# Altium PCB PAY-IF_R100.PcbDoc (part 3 of 5)
Units mm, origin at the board's own origin, x right, y up, seen from the top; angles counter-clockwise.
Board outline 93 x 90 mm, 6 copper layers (Top Layer, L2_GND, L3_PWR, L4_SIG, L5_GND, Bottom Layer), stack 1.598 mm thick; 271 components, 237 nets, 1362 pads, 661 vias.
Unrouted connection lines stored in the file: 5.
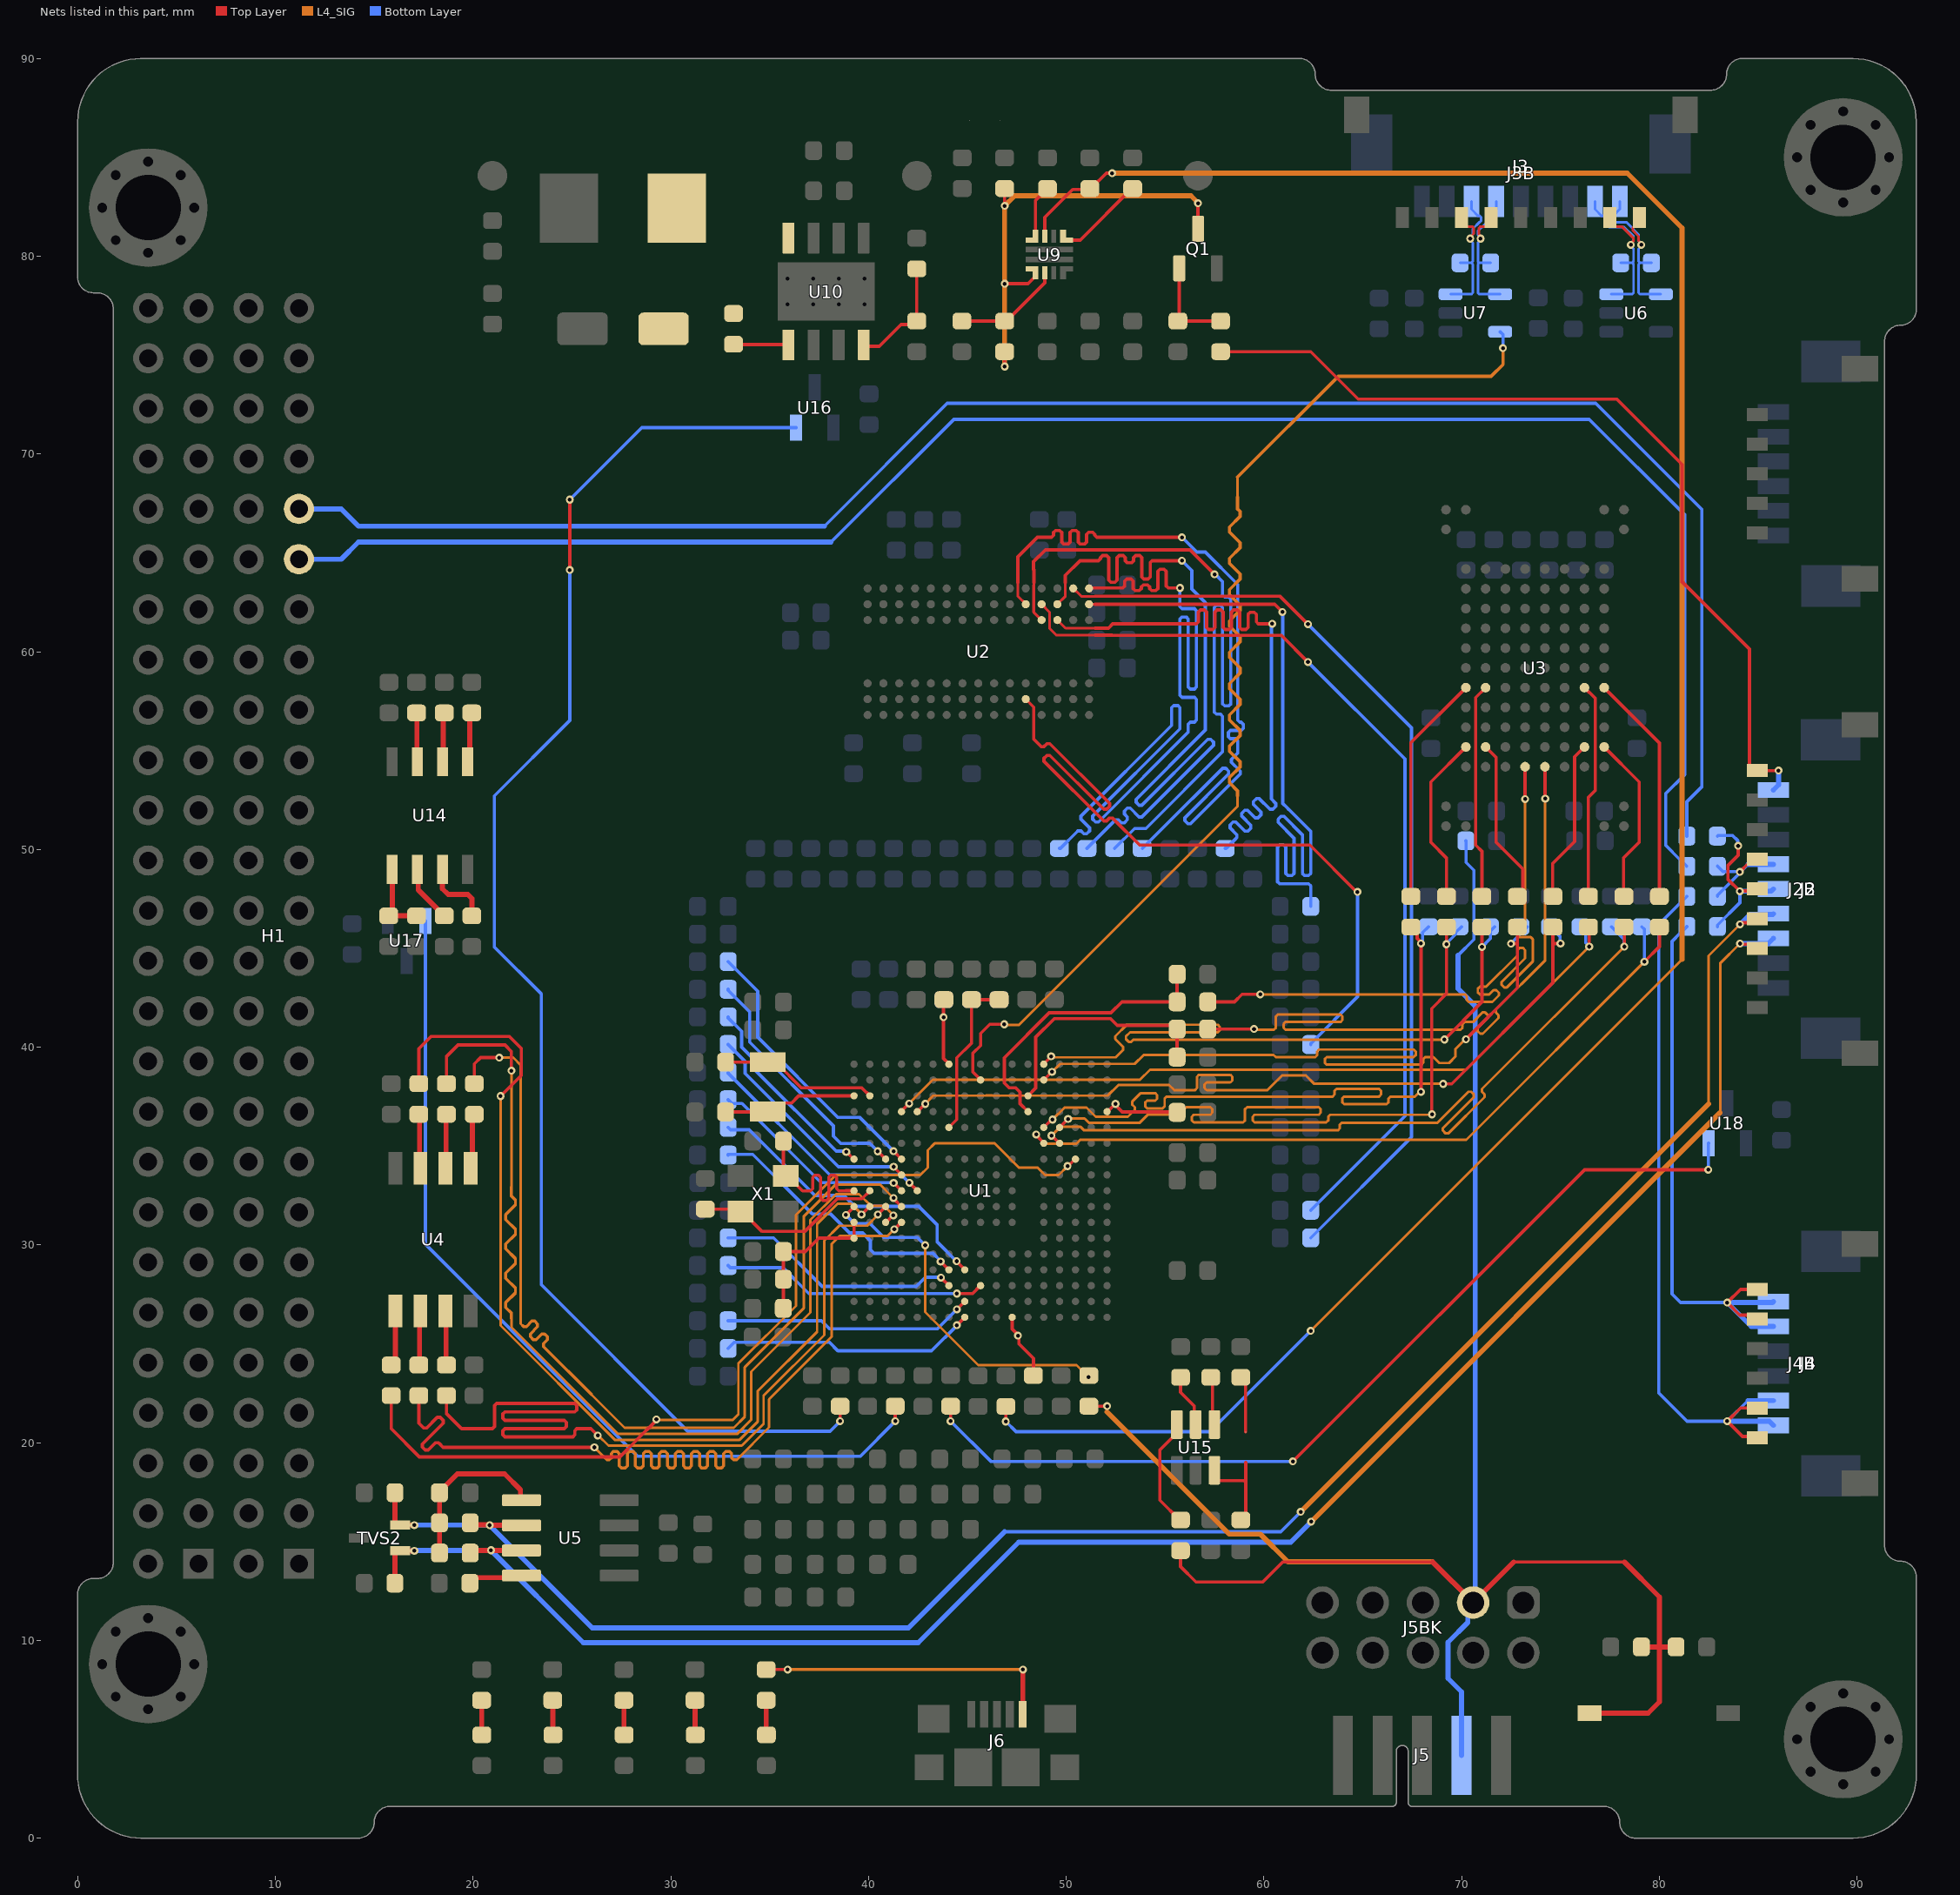
[diagram p7: the nets of this part, all layers, seen from the top]

## Via types
v1: diameter 0.4, hole 0.2, Top Layer to Bottom Layer, tented both sides, 661 vias

## Nets (pads, with @x,y where several pads share a name; then routed paths per layer and width w, separated by ;. In a path a pad name is that pad's centre, name@x,y a point inside that pad or via, vN(x,y) a via of type N, cw(c..) or ccw(c..) an arc to the next point about the centre after c; other vN are vias at no path point) (continued)
LVDS_SPI_SCK: U1.B9 U7.5 | length 58.6
  Top Layer w0.165: U1.B9@45.669,38.339 45.669,38.366 45.282,38.753 45.282,38.971 45.277,38.976 45.277,39.302 45.282,39.307 45.282,39.691 45.671,40.081 45.671,40.693 46.134,41.156 v1(46.866,41.156)
  L4_SIG w0.13: v1(46.866,41.156) 46.889,41.133 47.622,41.133 58.674,52.185 58.674,52.705 ; 58.674,67.818 58.674,68.834
  L4_SIG w0.169: 58.674,52.705 58.674,52.967 58.259,53.382 58.259,53.636 58.797,54.174 58.797,54.428 58.259,54.965 58.259,55.219 58.797,55.757 58.797,56.011 58.259,56.549 58.259,56.803 58.797,57.34 58.797,57.594 58.259,58.132 58.259,58.386 58.797,58.924 58.797,59.178 58.259,59.715 58.259,59.969 58.797,60.507 58.797,60.761 58.259,61.298 58.259,61.552 58.797,62.09 58.797,62.344 58.259,62.882 58.259,63.136 58.797,63.673 58.797,63.927 58.259,64.465 58.259,64.719 58.797,65.257 58.797,65.511 58.259,66.048 58.259,66.302 58.797,66.84 58.797,67.094 58.674,67.217 58.674,67.818 ; 58.674,68.834 63.775,73.935 71.501,73.935 72.096,74.53 v1(72.096,75.349)
  Bottom Layer w0.169: U7.5@71.954,76.177 72.096,76.035 v1(72.096,75.349)
LVDS_TxC_N: J3.7 J3B.3 R93.1 U7.3 | length 8.5
  Top Layer w0.13: J3.7@70,81.958 70,81.767 70.265,81.502 70.545,81.502 70.621,81.426 70.621,81.318 70.619,81.316 70.619,81.145 70.436,80.963 v1(70.436,80.89)
  Bottom Layer w0.13: U7.3@69.444,78.077 70.494,78.077 70.57,78.153 70.57,79.591 70.494,79.667 ; R93.1@69.924,79.667 70.494,79.667 ; J3B.3@70.5,82.773 70.5,82.373 70.835,82.038 70.92,82.038 70.996,81.962 70.996,81.8 70.92,81.724 70.908,81.724 70.57,81.387 70.57,81.097 70.436,80.963 v1(70.436,80.89) 70.436,80.817 70.57,80.683 70.57,80.301 70.57,79.743 70.494,79.667
LVDS_TxC_P: J3.6 J3B.4 R93.2 U7.4 | length 8.5
  Top Layer w0.13: v1(70.961,80.89) 70.91,80.942 70.91,81.068 70.876,81.101 70.876,81.209 70.879,81.212 70.879,81.426 70.955,81.502 71.235,81.502 71.5,81.767 J3.6@71.5,81.958
  Bottom Layer w0.13: R93.2@71.474,79.667 70.904,79.667 ; J3B.4@71.75,82.773 71.75,82.373 71.415,82.038 71.33,82.038 71.254,81.962 71.254,81.694 71.027,81.467 71.014,81.467 70.828,81.28 70.828,81.097 70.961,80.963 v1(70.961,80.89) 70.961,80.817 70.828,80.683 70.828,80.407 70.828,79.743 70.904,79.667 ; U7.4@71.954,78.077 70.904,78.077 70.828,78.153 70.828,79.591 70.904,79.667
LVDS_TxD_N: J3.2 J3B.8 R92.1 U6.3 | length 10
  Top Layer w0.13: J3.2@77.5,81.958 77.5,81.767 77.765,81.502 78.104,81.502 78.698,80.908 78.698,80.785 78.564,80.651 v1(78.564,80.578)
  Bottom Layer w0.13: J3B.8@76.75,82.773 76.75,82.373 77.085,82.038 77.17,82.038 77.246,81.962 77.246,81.694 77.473,81.467 78.228,81.467 78.698,80.996 78.698,80.785 78.564,80.651 v1(78.564,80.578) 78.564,80.505 78.698,80.371 78.698,80.145 78.698,79.743 78.622,79.667 ; U6.3@77.572,78.077 78.622,78.077 78.698,78.153 78.698,79.591 78.622,79.667 ; R92.1@78.052,79.667 78.622,79.667
LVDS_TxD_P: J3.1 J3B.9 R92.2 U6.4 | length 9.5
  Top Layer w0.13: J3.1@79,81.958 79,81.767 78.655,81.423 78.655,81.315 78.956,81.015 78.956,80.785 79.089,80.651 v1(79.089,80.578)
  Bottom Layer w0.13: J3B.9@78,82.773 78,82.373 77.665,82.038 77.58,82.038 77.504,81.962 77.504,81.8 77.58,81.724 78.334,81.724 78.956,81.103 78.956,80.785 79.089,80.651 v1(79.089,80.578) 79.089,80.505 78.956,80.371 78.956,80.251 78.956,79.743 79.032,79.667 ; R92.2@79.602,79.667 79.032,79.667 ; U6.4@80.082,78.077 79.032,78.077 78.956,78.153 78.956,79.591 79.032,79.667
MCU_VCAP: C46.2 C86.2 C87.2 U1.A7 U1.D17 U1.U11 | length 10.6
  Top Layer w0.165: v1(43.795,41.512) 43.795,39.435 44.069,39.161 U1.A7@44.069,39.139 ; v1@43.799,41.516 C87.2@43.799,42.389 ; U1.U11@47.269,26.339 47.269,25.749 47.562,25.456 v1(47.562,25.41) ; v1@47.568,25.346 47.607,25.307 47.607,24.994 48.343,24.258 C46.2@48.343,23.393 ; U1.D17@52.069,36.739 52.088,36.739 52.478,37.129 v1(52.497,37.129) 52.497,37.066 52.723,36.84 52.723,36.838 52.84,36.721 55.595,36.721 C86.2@55.613,36.703
MRAM_CLK: R98.2 U1.L3 | length 52.3
  Top Layer w0.165: U1.L3@40.869,31.139 40.887,31.139 41.244,31.496 v1(41.262,31.496)
  Top Layer w0.169: R98.2@18.654,38.153 18.654,39.521 19.247,40.114 21.61,40.114 21.937,39.786 21.937,38.815 v1(21.945,38.807)
  L4_SIG w0.13: 21.945,26.289 21.945,25.83 27.339,20.437 33.356,20.437 34.074,21.154 34.074,23.587 37.067,26.581 37.067,31.268 38.367,32.568 39.528,32.568 40.127,31.969 40.789,31.969 v1(41.262,31.496) ; 21.945,32.933 v1(21.945,38.807)
  L4_SIG w0.152: 21.945,26.289 21.945,26.543 21.657,26.831 21.657,27.085 22.144,27.572 22.144,27.826 21.657,28.314 21.657,28.568 22.144,29.055 22.144,29.309 21.657,29.796 21.657,30.05 22.144,30.537 22.144,30.791 21.657,31.278 21.657,31.532 22.144,32.019 22.144,32.273 21.945,32.472 21.945,32.933
MRAM_CS: R94.1 U1.G15 | length 49.2
  Top Layer w0.165: 27.429,19.279 28.273,20.123 28.273,20.131 29.273,21.13 v1(29.273,21.177) ; v1(50.071,33.985) 50.093,33.985 50.447,34.339 U1.G15@50.469,34.339
  Top Layer w0.169: R94.1@15.86,22.379 15.86,20.704 17.285,19.279 27.429,19.279
  L4_SIG w0.13: v1(29.273,21.177) 29.296,21.154 33.142,21.154 33.419,21.431 33.419,24.002 36.33,26.913 36.33,31.518 38.355,33.543 42.632,33.543 43,33.911 43,34.785 43.345,35.129 46.385,35.129 47.61,33.904 48.56,33.904 48.926,33.538 49.125,33.538 49.126,33.539 49.449,33.539 49.45,33.538 49.624,33.538 v1(50.071,33.985)
MRAM_IO0: R99.2 U1.K4 | length 49.8
  Top Layer w0.165: v1(41.269,32.37) 41.269,32.339 U1.K4@41.669,31.939
  Top Layer w0.169: R99.2@20.064,38.153 20.064,39.153 20.379,39.468 v1(21.326,39.468)
  L4_SIG w0.13: v1(21.326,39.468) 22.031,39.468 22.41,39.089 22.41,26.009 22.499,25.919 ; 25.993,22.425 27.666,20.752 33.186,20.752 33.749,21.314 33.749,23.815 36.725,26.791 36.725,31.434 38.347,33.056 40.583,33.056 v1(41.269,32.37)
  L4_SIG w0.152: 22.499,25.919 22.553,25.866 22.696,25.866 22.976,26.145 23.119,26.145 23.263,26.001 23.263,25.858 22.901,25.496 22.901,25.353 23.045,25.209 23.188,25.209 23.475,25.495 23.618,25.495 23.762,25.352 23.762,25.208 23.558,25.004 23.558,24.861 25.993,22.425
MRAM_IO1: R95.1 U1.L4 | length 48.7
  Top Layer w0.165: v1(41.307,30.789) 41.314,30.789 41.663,31.139 U1.L4@41.669,31.139
  Top Layer w0.169: R95.1@17.257,22.379 17.257,21.104 17.257,20.985 17.502,20.74 17.651,20.74 18.192,21.281 18.341,21.281 18.491,21.131 18.491,20.981 17.433,19.923 17.433,19.774 17.582,19.624 17.732,19.624 18.1,19.992 18.249,19.992 18.309,19.932 18.48,19.761 v1(26.137,19.761)
  L4_SIG w0.13: v1(26.137,19.761) 26.771,19.127 26.812,19.127 ; 33.334,19.127 34.976,20.77 34.976,22.188 38.133,25.345 38.133,30.036 38.549,30.452 40.97,30.452 v1(41.307,30.789)
  L4_SIG w0.152: 26.812,19.127 26.888,19.127 26.989,19.228 26.989,19.45 27.091,19.552 27.294,19.552 27.395,19.45 27.395,18.826 27.497,18.725 27.7,18.725 27.801,18.826 27.801,19.45 27.903,19.552 28.106,19.552 28.207,19.45 28.207,18.826 28.309,18.725 28.512,18.725 28.613,18.826 28.613,19.45 28.715,19.552 28.918,19.552 29.019,19.45 29.019,18.826 29.121,18.725 29.324,18.725 29.425,18.826 29.425,19.45 29.527,19.552 29.73,19.552 29.831,19.45 29.831,18.826 29.933,18.725 30.136,18.725 30.237,18.826 30.237,19.45 30.339,19.552 30.542,19.552 30.643,19.45 30.643,18.826 30.745,18.725 30.948,18.725 31.049,18.826 31.049,19.45 31.151,19.552 31.354,19.552 31.455,19.45 31.455,18.826 31.557,18.725 31.76,18.725 31.861,18.826 31.861,19.45 31.963,19.552 32.166,19.552 32.267,19.45 32.267,18.826 32.369,18.725 32.572,18.725 32.673,18.826 32.673,19.45 32.775,19.552 32.978,19.552 33.079,19.45 33.079,19.228 33.181,19.127 33.334,19.127
MRAM_IO2: R97.1 U1.K3 | length 49
  Top Layer w0.165: 25.339,20.708 25.959,20.708 v1(26.31,20.357) ; v1(40.473,31.533) 40.473,31.538 40.869,31.934 U1.K3@40.869,31.939
  Top Layer w0.169: R97.1@18.654,22.379 18.654,21.478 19.424,20.708 20.891,20.708 20.975,20.708 21.081,20.814 21.081,21.237 21.081,21.871 21.187,21.977 25.148,21.977 25.254,21.871 25.254,21.66 25.148,21.554 21.61,21.554 21.504,21.448 21.504,21.237 21.61,21.131 24.62,21.131 24.725,21.025 24.725,20.814 24.62,20.708 21.61,20.708 21.504,20.602 21.504,20.391 21.61,20.285 25.043,20.285 25.148,20.391 25.148,20.602 25.254,20.708 25.339,20.708
  L4_SIG w0.13: v1(26.31,20.357) 26.336,20.357 26.848,19.844 33.592,19.844 34.696,20.949 34.696,22.375 37.76,25.438 37.76,30.207 38.524,30.971 39.929,30.971 40.473,31.515 v1(40.473,31.533)
MRAM_IO3: R96.2 U1.K2 | length 52.4
  Top Layer w0.165: v1(39.646,31.539) 39.657,31.539 40.057,31.939 U1.K2@40.069,31.939
  Top Layer w0.169: R96.2@17.257,38.153 17.257,39.926 17.869,40.538 21.843,40.538 22.443,39.938 22.443,38.577 v1(21.391,37.525)
  L4_SIG w0.13: v1(21.391,37.525) 21.391,25.919 27.167,20.143 33.484,20.143 34.393,21.052 34.393,22.593 37.403,25.604 37.403,31.057 38.432,32.086 39.122,32.086 39.646,31.562 v1(39.646,31.539)
NetC35_1: C35.1 R114.1 R115.2 U5.5 | length 8.5
  Top Layer w0.254: R114.1@18.305,14.417 R115.2@18.305,15.941 C35.1@18.305,17.465 18.305,17.515 19.205,18.415 21.6,18.415 22.399,17.616 22.399,17.137 U5.5@22.452,17.084
NetC42_2: C42.2 U9.10 | length 2.7
  Top Layer w0.165: U9.10@48.447,81.013 48.447,82.819 48.706,83.078 48.706,83.082 49.051,83.426 C42.2@49.054,83.426
NetC43_2: C43.2 U9.7 | length 4.8
  Top Layer w0.165: U9.7@49.847,81.013 49.847,80.842 49.87,80.819 50.709,80.819 53.316,83.426 C43.2@53.366,83.426
NetC44_1: C44.1 D1.2 L1.1 U10.8
NetC44_2: C44.2 U10.1 | length 2.8
  Top Layer w0.165: C44.2@33.173,75.552 33.191,75.534 35.935,75.534 U10.1@35.952,75.517
NetC93_2: C93.2 C94.2 FB2.2 U1.L1 U1.M1 | length 7.5
  Top Layer w0.165: FB2.2@35.692,26.794 35.696,26.798 35.696,29.658 C93.2@35.7,29.662 36.811,29.662 37.488,30.339 U1.M1@39.269,30.339 U1.L1@39.269,31.139
NetJ2_3: J2.3 J2B.7 R114.2 R143.1 TVS2.1 U5.7 | length 96.1
  Top Layer w0.165: v1(84.083,45.238) 84.109,45.238 84.143,45.203 84.755,45.203 J2.3@84.958,45
  Top Layer w0.254: R143.1@16.047,12.893 16.047,14.427 16.149,14.529 TVS2.1@16.311,14.529 v1(17.03,14.529) ; R114.2@19.855,14.417 19.978,14.54 20.887,14.54 v1(20.906,14.559) 20.913,14.551 22.444,14.551 U5.7@22.452,14.544
  L4_SIG w0.13: 83.081,36.692 83.081,44.236 v1(84.083,45.238)
  L4_SIG w0.254: v1(62.393,16.003) 83.081,36.692
  Bottom Layer w0.254: v1(17.03,14.529) 17.045,14.544 20.891,14.544 v1(20.906,14.559) 25.578,9.886 42.516,9.886 47.597,14.968 61.358,14.968 v1(62.393,16.003) ; v1(84.083,45.238) 85.507,45.238 J2B.7@85.77,45.5
NetJ2_4: J2.4 J2B.6 R115.1 R142.1 TVS2.2 U5.6 | length 96.4
  Top Layer w0.165: v1(84.083,46.208) 84.109,46.208 84.198,46.297 84.755,46.297 J2.4@84.958,46.5
  Top Layer w0.254: R142.1@16.047,17.465 16.047,15.93 16.149,15.829 TVS2.2@16.311,15.829 v1(17.03,15.829) ; R115.1@19.855,15.941 19.955,15.84 20.82,15.84 v1(20.839,15.822) 20.843,15.818 22.448,15.818 U5.6@22.452,15.814
  L4_SIG w0.13: 82.494,37.13 82.494,44.619 v1(84.083,46.208)
  L4_SIG w0.254: v1(61.865,16.5) 82.494,37.13
  Bottom Layer w0.165: v1@20.832,15.829 v1(20.839,15.822) ; 46.889,15.494 60.859,15.494 v1(61.865,16.5)
  Bottom Layer w0.254: v1(17.03,15.829) v1@20.832,15.829 ; v1(20.839,15.822) 26.029,10.631 42.026,10.631 46.889,15.494 ; v1(84.083,46.208) 84.591,46.717 85.736,46.717 J2B.6@85.77,46.75
NetJ2_5: J2.5 J2B.5 R90.1 R150.2 | length 9.1
  Top Layer w0.165: v1(83.989,50.18) 83.989,49.703 83.469,49.182 83.469,48.492 v1(84.075,47.885) 84.094,47.903 84.861,47.903 J2.5@84.958,48
  Bottom Layer w0.165: R90.1@82.944,46.101 82.944,46.169 84.075,47.3 84.075,47.767 v1(84.075,47.885) ; R150.2@82.944,50.673 82.98,50.709 83.709,50.709 83.971,50.447 83.971,50.198 v1(83.989,50.18)
  Bottom Layer w0.254: v1(84.075,47.885) 85.655,47.885 J2B.5@85.77,48
NetJ2_6: J2.6 J2B.4 R89.1 R148.2 | length 6
  Top Layer w0.165: v1(84.076,48.866) 84.507,49.297 84.755,49.297 J2.6@84.958,49.5
  Bottom Layer w0.165: R89.1@82.944,47.625 82.944,47.678 84.058,48.792 84.058,48.848 v1(84.076,48.866) ; R148.2@82.944,49.149 83.208,48.885 84.058,48.885 v1(84.076,48.866) ; 84.483,49.247 84.102,48.866 v1(84.076,48.866)
  Bottom Layer w0.254: 84.483,49.247 J2B.4@85.767,49.247
NetJ2_9: J2.9 J2B.1 R88.1 | length 45
  Top Layer w0.165: R88.1@57.811,75.171 62.37,75.171 64.77,72.771 77.851,72.771 81.153,69.469 81.153,63.542 84.564,60.13 84.564,54.248 84.812,54 J2.9@84.958,54 84.972,53.986 v1(86.034,53.986)
  Bottom Layer w0.254: J2B.1@85.77,53 86.034,53.264 v1(86.034,53.986)
NetJ6_1: J6.1 R100.2 | length 15.3
  Top Layer w0.152: R100.2@34.826,8.521 v1(35.912,8.521)
  Top Layer w0.254: J6.1@47.8,6.257 47.808,6.265 47.808,8.515 v1(47.815,8.523)
  L4_SIG w0.152: v1(35.912,8.521) v1(35.912,8.521) 47.814,8.522 v1(47.815,8.523)
NetLED1_1: LED1.1 R79.2 | length 1.8
  Top Layer w0.254: R79.2@27.63,6.971 27.637,6.965 27.637,5.226 LED1.1@27.643,5.22
NetLED2_1: LED2.1 R80.2 | length 1.8
  Top Layer w0.254: R80.2@31.228,6.971 31.234,6.965 31.234,5.226 LED2.1@31.241,5.22
NetLED3_1: LED3.1 R119.1 | length 1.9
  Top Layer w0.254: 20.435,6.302 20.441,6.296 ; R119.1@20.441,7.093 20.441,5.226 LED3.1@20.447,5.22
NetLED4_1: LED4.1 R100.1 | length 1.8
  Top Layer w0.254: R100.1@34.826,6.971 34.832,6.965 34.832,5.226 LED4.1@34.838,5.22
NetLED5_1: LED5.1 R121.1 | length 1.9
  Top Layer w0.254: 24.032,6.302 24.039,6.296 ; R121.1@24.039,7.093 24.039,5.226 LED5.1@24.045,5.22
NetQ1_1: Q1.1 R88.2 R91.2 | length 5.1
  Top Layer w0.165: Q1.1@55.718,79.391 55.723,79.387 55.723,76.791 R91.2@55.652,76.721 R88.2@57.811,76.721 R88.2@58.009,76.918
NetQ1_3: Q1.3 R123.2 R124.1 U9.1 | length 23.1
  Top Layer w0.165: R123.2@46.886,83.426 46.888,83.424 46.888,82.552 v1(46.889,82.55) ; v1(46.889,74.422) R124.1@46.889,75.171 ; v1(46.889,78.613) 48.069,78.613 48.424,78.968 48.424,79.143 U9.1@48.447,79.166 ; Q1.3@56.668,81.391 v1(56.668,82.677)
  L4_SIG w0.254: v1(46.889,74.422) v1(46.889,78.613) v1(46.889,82.55) 47.397,83.058 56.313,83.058 56.668,82.703 v1(56.668,82.677)
NetR81_2: R81.2 U1.K1 | length 18.2
  Top Layer w0.165: v1(38.862,31.515) 38.862,31.523 39.269,31.93 U1.K1@39.269,31.939
  L4_SIG w0.13: v1(42.869,29.979) 42.869,26.606 45.552,23.923 50.529,23.923 v1(51.138,23.314)
  Bottom Layer w0.165: v1(38.862,31.515) 39.302,31.075 40.086,31.075 40.784,30.377 42.472,30.377 v1(42.869,29.979)
NetR84_2: R84.2 R86.1 U1.E7 | length 8.3
  Top Layer w0.165: U1.E7@44.069,35.939 44.469,36.339 44.469,39.46 45.212,40.203 R86.1@45.212,42.405 R84.2@46.609,42.405
NetR85_1: R85.1 R126.1 U9.9 | length 117.3
  Top Layer w0.165: v1(46.948,21.07) R85.1@46.948,21.831 ; U9.9@48.923,81.013 48.923,81.967 50.334,83.378 51.15,83.378 R126.1@51.198,83.426 51.257,83.426 52.032,84.201 v1(52.324,84.201)
  L4_SIG w0.13: v1(62.37,25.654) 81.153,44.437
  L4_SIG w0.254: v1(52.324,84.201) 78.38,84.201 81.153,81.428 81.153,44.437
  Bottom Layer w0.165: v1(46.948,21.07) 47.468,20.55 57.266,20.55 v1(62.37,25.654)
NetR94_2: R94.2 U4.1 | length 2.8
  Top Layer w0.254: R94.2@15.86,23.929 16.067,24.135 U4.1@16.067,26.666
NetR95_2: R95.2 U4.2 | length 2.8
  Top Layer w0.254: R95.2@17.257,23.929 17.297,23.969 17.297,26.626 U4.2@17.337,26.666
NetR96_1: R96.1 U4.7 | length 2.8
  Top Layer w0.254: R96.1@17.257,36.603 17.297,36.563 17.297,33.906 U4.7@17.337,33.866
NetR97_2: R97.2 U4.3 | length 2.8
  Top Layer w0.254: U4.3@18.607,26.666 18.63,26.642 18.63,23.953 R97.2@18.654,23.929
NetR98_1: R98.1 U4.6 | length 2.8
  Top Layer w0.254: U4.6@18.607,33.866 18.63,33.89 18.63,36.579 R98.1@18.654,36.603
NetR99_1: R99.1 U4.5 | length 2.8
  Top Layer w0.254: U4.5@19.877,33.866 19.97,33.96 19.97,36.51 R99.1@20.064,36.603
NetR116_2: R116.2 U5.8 | length 2.8
  Top Layer w0.254: R116.2@19.842,12.893 20.12,13.172 22.349,13.172 U5.8@22.452,13.274
NetR124_2: R124.2 R125.1 U9.2 | length 5.5
  Top Layer w0.165: R125.1@44.73,76.721 R124.2@46.889,76.721 46.985,76.721 48.921,78.656 48.921,79.164 U9.2@48.923,79.166
NetR127_2: R127.2 R128.1 U10.4 | length 5.9
  Top Layer w0.165: U10.4@39.762,75.517 39.831,75.449 40.55,75.449 41.644,76.543 42.266,76.543 R128.1@42.444,76.721 R127.2@42.444,79.362
NetR151_1: R151.1 R154.2 U14.1 | length 3.8
  Top Layer w0.254: U14.1@15.913,48.986 15.913,46.82 R151.1@15.736,46.643 R154.2@17.145,46.643
NetR152_1: R152.1 U14.7 | length 2.5
  Top Layer w0.254: R152.1@17.145,56.904 17.164,56.885 17.164,54.453 U14.7@17.183,54.434
NetR153_1: R153.1 U14.3 | length 3.6
  Top Layer w0.254: U14.3@18.453,48.986 18.453,48.012 18.744,47.721 19.737,47.721 19.939,47.519 19.939,46.739 R153.1@19.843,46.643
NetR155_2: R155.2 U14.6 | length 2.5
  Top Layer w0.254: U14.6@18.453,54.434 18.497,54.479 18.497,56.859 R155.2@18.542,56.904
NetR156_2: R156.2 U14.5 | length 2.6
  Top Layer w0.254: U14.5@19.723,54.434 19.831,54.542 19.831,56.796 R156.2@19.939,56.904
NetR157_2: R157.2 U14.2 | length 2.9
  Top Layer w0.254: U14.2@17.183,48.986 17.226,48.942 17.226,47.956 18.194,46.988 R157.2@18.538,46.643
NetR158_1: R158.1 U15.6 | length 5.7
  Top Layer w0.165: U15.6@55.599,20.914 55.599,20.484 55.431,20.316 55.424,20.316 54.737,19.629 54.737,17.089 55.737,16.089 R158.1@55.787,16.089
NetR159_1: R159.1 U15.5 | length 2.7
  Top Layer w0.165: R159.1@55.787,23.302 55.787,22.548 56.481,21.854 56.481,20.982 U15.5@56.549,20.914
NetR160_1: R160.1 U15.4 | length 2.5
  Top Layer w0.165: R160.1@57.311,23.302 57.405,23.208 57.405,21.008 U15.4@57.499,20.914
NetR161_2: R161.2 SB2.1 | length 2.8
  Top Layer w0.165: R161.2@58.835,23.302 59.072,23.065 59.072,20.551
NetR162_2: R162.2 SB2.2 U15.3 | length 5.1
  Top Layer w0.165: U15.3@57.499,18.604 57.499,18.248 57.667,18.08 58.997,18.08 59.089,17.988 ; R162.2@58.835,16.089 59.089,16.343 59.089,17.988 ; SB2.2@59.089,18.997 59.089,18.08 59.089,17.988
NetR163_1: R163.1 U16.2 | length 74.4
  Top Layer w0.165: v1(24.892,64.135) v1(24.892,67.691) ; v1(38.566,21.082) R163.1@38.566,21.843
  Bottom Layer w0.165: v1(24.892,64.135) 24.892,56.524 21.073,52.705 21.073,45.065 23.458,42.68 23.458,27.977 30.861,20.574 38.058,20.574 v1(38.566,21.082) ; v1(24.892,67.691) 28.538,71.337 U16.2@36.332,71.337
NetR164_1: R164.1 U17.2 | length 46.1
  Top Layer w0.165: v1(41.354,21.082) R164.1@41.354,21.843
  Bottom Layer w0.165: U17.2@17.587,46.392 17.587,30.038 28.321,19.304 39.576,19.304 v1(41.354,21.082)
NetR165_1: R165.1 U18.2 | length 47.4
  Top Layer w0.165: v1(44.154,21.082) R165.1@44.154,21.843 ; v1(61.468,19.05) 76.219,33.801 v1(82.479,33.801)
  Bottom Layer w0.165: v1(44.154,21.082) 46.186,19.05 v1(61.468,19.05) ; v1(82.479,33.801) 82.484,33.806 82.484,35.137 U18.2@82.489,35.142
OBC1_I2C1_SCL: H1.43 R150.1 | length 93
  Bottom Layer w0.165: 37.777,66.352 43.984,72.559 76.787,72.559 82.158,67.188 82.158,53.177 81.394,52.412 R150.1@81.394,50.673
  Bottom Layer w0.254: H1.43@11.19,67.22 13.332,67.22 14.2,66.352 37.777,66.352
OBC1_I2C1_SDA: H1.41 R148.1 | length 93.6
  Bottom Layer w0.165: 38.11,65.548 44.317,71.755 76.454,71.755 81.28,66.929 81.28,53.78 80.323,52.824 80.323,50.208 81.034,49.497 81.05,49.497 81.382,49.164 R148.1@81.382,49.149
  Bottom Layer w0.254: H1.41@11.19,64.68 13.332,64.68 14.2,65.548 38.11,65.548
OBC2_I2C2_SCL: J4.5 J4.6 J4B.1 J4B.2 R90.2 | length 30.7
  Top Layer w0.165: J4.5@84.958,26.25 84.755,26.453 84.068,26.453 v1(83.439,27.082) 84.107,27.75 J4.6@84.958,27.75
  Bottom Layer w0.165: R90.2@81.394,46.101 81.394,46.097 81.05,45.753 81.046,45.753 80.645,45.352 80.645,27.515 81.072,27.088 v1@83.433,27.088
  Bottom Layer w0.254: J4B.2@85.773,25.875 84.646,25.875 v1(83.439,27.082) 85.73,27.082 J4B.1@85.773,27.125
OBC2_I2C2_SDA: J4.1 J4.2 J4B.5 J4B.6 R89.2 | length 38.6
  Top Layer w0.165: J4.1@84.958,20.25 84.892,20.316 84.205,20.316 v1(83.439,21.082) 84.107,21.75 J4.2@84.958,21.75
  Bottom Layer w0.165: R89.2@81.394,47.625 81.394,47.621 81.05,47.277 81.046,47.277 79.977,46.208 79.977,22.512 81.407,21.082 v1(83.439,21.082) 84.482,22.125
  Bottom Layer w0.254: v1(83.439,21.082) 85.566,21.082 J4B.6@85.773,20.875 ; 84.482,22.125 J4B.5@85.773,22.125
OSC32_IN: C25.2 U1.C2 X2.1 | length 8
  Top Layer w0.165: C25.2@32.775,39.245 X2.1@34.91,39.245 35.31,39.245 36.615,37.94 39.668,37.94 U1.C2@40.069,37.539
OSC32_OUT: C26.2 U1.C1 X2.2 | length 6.8
  Top Layer w0.165: C26.2@32.775,36.722 34.886,36.722 X2.2@34.91,36.745 35.334,37.169 36.101,37.169 36.471,37.539 U1.C1@39.269,37.539
OSCIN: C22.2 U1.J1 X1.3 | length 9.2
  Top Layer w0.152: X1.3@36.042,33.362 36.665,32.739 37.074,32.739 37.175,32.84 37.175,33.419 37.277,33.521 37.48,33.521 37.581,33.419 37.581,32.351 37.683,32.25 37.886,32.25 37.987,32.351 37.987,33.419 38.089,33.521 38.292,33.521 38.393,33.419 38.393,32.84 38.495,32.739 38.856,32.739
  Top Layer w0.165: C22.2@35.7,35.25 35.7,33.604 X1.3@35.821,33.483 35.921,33.483 X1.3@36.042,33.362 ; 38.856,32.739 U1.J1@39.269,32.739
OSCOUT: C23.2 U1.J2 X1.1 | length 9.6
  Top Layer w0.165: C23.2@31.75,31.808 33.396,31.808 X1.1@33.521,31.683 33.621,31.683 34.625,30.679 36.775,30.679 38.429,32.334 39.668,32.334 U1.J2@40.069,32.734
RESET#: BT1.2 C24.2 J5.9 J5BK.3 R19.2 R81.1 R87.2 R158.2 | length 110.7
  Top Layer w0.165: R81.1@51.147,21.843 v1(52.07,21.844) ; R158.2@55.787,14.539 55.787,13.732 56.565,12.954 59.944,12.954 60.954,13.964 68.535,13.964 ; 72.638,13.964 78.238,13.964
  Top Layer w0.254: 68.535,13.964 J5BK.3@70.587,11.913 72.638,13.964 ; BT1.2@76.482,6.314 79.43,6.314 80.01,6.894 80.01,9.667 ; 78.238,13.964 80.01,12.192 80.01,9.667 ; R87.2@79.095,9.667 80.01,9.667 ; C24.2@80.847,9.667 80.01,9.667
  L4_SIG w0.13: 52.07,21.55 v1(52.07,21.844)
  L4_SIG w0.254: 52.07,21.55 58.253,15.367 59.824,15.367 61.216,13.975 68.524,13.975 J5BK.3@70.587,11.913
  Bottom Layer w0.165: 69.816,44.643 70.621,45.449 70.621,48.943 70.224,49.34 70.224,50.427 R19.2@70.218,50.433
  Bottom Layer w0.254: 69.816,44.643 69.816,42.96 70.695,42.081 70.695,12.021 J5BK.3@70.587,11.913 70.319,11.645 70.319,10.905 69.317,9.902 69.317,8.078 70,7.394 J5.9@70,4.186
SDIO1_B_CK: R20.2 U3.P6@74.215,54.181 | length 38.1
  Top Layer w0.165: R20.2@57.163,40.917 v1(59.503,40.918) ; U3.P6@74.215,54.181 74.223,54.173 74.223,52.576 v1(74.231,52.567)
  L4_SIG w0.13: v1(59.503,40.918) 59.534,40.887 60.449,40.887 60.514,40.887 60.61,40.983 60.61,41.559 60.706,41.655 63.87,41.655 63.966,41.559 63.966,41.367 63.87,41.271 61.09,41.271 60.994,41.175 60.994,40.983 61.09,40.887 65.054,40.887 69.888,40.887 69.953,40.887 70.049,40.983 70.049,41.175 70.145,41.271 70.577,41.271 71.058,41.752 71.194,41.752 71.33,41.616 71.33,41.481 70.804,40.955 70.804,40.819 70.94,40.683 71.075,40.683 71.873,41.481 71.873,41.616 71.737,41.752 71.737,41.888 71.783,41.934 74.215,44.366 74.215,52.551 v1(74.231,52.567)
SDIO1_B_CMD: R21.2 U3.P5@73.215,54.181 | length 35.5
  Top Layer w0.165: R21.2@57.163,42.291 58.513,42.291 58.894,42.672 v1(59.817,42.672) ; v1(73.211,52.547) 73.213,52.549 73.213,54.179 U3.P5@73.215,54.181
  L4_SIG w0.13: v1(59.817,42.672) 70.104,42.672 70.169,42.672 70.265,42.576 70.265,42.384 70.361,42.288 71.559,42.288 71.887,42.616 71.887,42.752 71.752,42.887 71.616,42.887 71.4,42.672 70.919,42.672 70.823,42.768 70.823,42.96 70.919,43.056 71.241,43.056 72.831,44.646 72.831,44.913 72.927,45.009 73.119,45.009 73.215,44.913 73.215,44.487 72.023,43.295 72.023,43.159 72.159,43.023 72.295,43.023 73.599,44.328 73.599,45.465 73.503,45.561 72.927,45.561 72.831,45.657 72.831,45.849 72.927,45.945 73.119,45.945 73.215,46.041 73.215,46.106 73.215,52.542 v1(73.211,52.547)
SDIO1_B_D0: R9.2 U3.K2@70.215,58.181 | length 11.7
  Top Layer w0.165: R9.2@67.437,47.625 67.437,55.403 U3.K2@70.215,58.181
SDIO1_B_D1: R10.2 U3.N2@70.215,55.181 | length 8.6
  Top Layer w0.165: R10.2@69.233,47.625 69.233,49.576 68.445,50.364 68.445,53.411 U3.N2@70.215,55.181
SDIO1_B_D2: R11.2 U3.K3@71.215,58.181 | length 10.9
  Top Layer w0.165: R11.2@71.029,47.625 71.029,49.907 70.716,50.22 70.716,57.682 U3.K3@71.215,58.181
SDIO1_B_D3: R12.2 U3.N3@71.215,55.181 | length 8.4
  Top Layer w0.165: U3.N3@71.215,55.181 71.746,54.65 71.746,50.363 73.095,49.015 73.095,47.894 R12.2@72.825,47.625
SDIO1_B_D4: R13.2 U3.N8@76.215,55.181 | length 8.2
  Top Layer w0.165: R13.2@74.604,47.625 74.604,49.284 75.722,50.402 75.722,54.689 U3.N8@76.215,55.181
SDIO1_B_D5: R14.2 U3.K8@76.215,58.181 | length 10.9
  Top Layer w0.165: U3.K8@76.229,58.181 76.762,57.647 76.762,52.977 76.413,52.628 R14.2@76.413,47.63
SDIO1_B_D6: R15.2 U3.N9@77.215,55.181 | length 8.6
  Top Layer w0.165: U3.N9@77.215,55.181 78.985,53.411 78.985,50.365 78.197,49.576 R15.2@78.197,47.625
SDIO1_B_D7: R16.2 U3.K9@77.215,58.181 | length 11.7
  Top Layer w0.165: U3.K9@77.215,58.181 80.01,55.386 R16.2@80.01,47.625
SDIO1_CK: R18.1 R20.1 U1.C12 | length 12.3
  Top Layer w0.165: U1.C12@48.069,37.539 48.462,37.931 48.462,40.506 49.4,41.444 52.238,41.444 52.583,41.099 55.431,41.099 R20.1@55.613,40.917 R18.1@55.613,39.497
SDIO1_CMD: R21.1 R22.1 U1.D12 | length 14.7
  Top Layer w0.165: U1.D12@48.069,36.739 47.67,37.138 47.67,37.722 47.451,37.941 47.112,37.941 46.869,38.183 46.869,39.461 49.143,41.734 52.265,41.734 52.821,42.291 R21.1@55.613,42.291 R22.1@55.613,43.688
SDIO1_D0: R1.1 R9.1 U1.E13 | length 37.5
  Top Layer w0.165: U1.E13@48.869,35.939 v1@49.269,36.339 ; R9.1@67.437,46.075 67.749,45.763 67.749,45.504 67.95,45.304 v1(67.95,45.24) v1(67.95,37.738)
  L4_SIG w0.13: v1(49.308,36.339) 49.918,36.949 51.032,36.949 51.497,36.484 53.124,36.484 53.426,36.785 53.472,36.831 53.472,36.967 53.336,37.103 53.336,37.238 53.773,37.676 54.502,37.676 54.598,37.58 54.598,37.388 54.502,37.292 54.091,37.292 53.995,37.196 53.995,37.004 54.091,36.908 54.886,36.908 54.982,37.004 54.982,37.196 54.982,37.406 55.078,37.502 55.143,37.502 63.418,37.502 63.483,37.502 63.579,37.598 63.579,37.79 63.675,37.886 65.831,37.886 65.927,37.79 65.927,37.598 65.831,37.502 64.059,37.502 63.963,37.406 63.963,37.214 64.059,37.118 66.215,37.118 66.311,37.214 66.311,37.406 66.407,37.502 66.472,37.502 67.641,37.502 67.877,37.738 v1(67.95,37.738)
  Bottom Layer w0.165: v1(67.95,45.24) 67.95,45.28 68.031,45.361 68.031,45.797 68.322,46.088 R1.1@68.326,46.088
SDIO1_D1: R2.1 R10.1 U1.E14 | length 41.5
  Top Layer w0.165: U1.E14@49.669,35.939 49.669,35.941 v1(50.096,36.369) v1(50.096,36.369) ; v1(68.504,36.603) 68.487,36.62 68.487,41.952 69.233,42.699 69.233,45.206 R10.1@69.233,46.075
  L4_SIG w0.13: v1(50.096,36.369) 50.118,36.391 50.931,36.391 51.139,36.183 53.73,36.183 54.127,36.58 55.817,36.58 55.882,36.58 55.978,36.676 55.978,36.868 56.074,36.964 57.299,36.964 57.395,36.868 57.395,36.676 57.299,36.58 56.458,36.58 56.362,36.484 56.362,36.292 56.458,36.196 58.954,36.196 59.05,36.292 59.05,36.868 59.146,36.964 62.777,36.964 62.873,36.868 62.873,36.676 62.777,36.58 59.53,36.58 59.434,36.484 59.434,36.292 59.53,36.196 63.161,36.196 63.257,36.292 63.257,36.484 63.353,36.58 63.418,36.58 68.481,36.58 v1(68.504,36.603)
  Bottom Layer w0.165: v1(69.235,45.206) 69.235,45.232 69.283,45.28 69.283,45.297 69.7,45.714 69.7,45.797 69.991,46.088 R2.1@69.995,46.088
SDIO1_D2: R3.1 R11.1 U1.A13 | length 39.9
  Top Layer w0.165: U1.A13@48.869,39.139 48.869,39.152 49.238,39.52 v1(49.238,39.533) ; v1(69.133,40.385) 71.037,42.289 v1@71.037,45.061 ; R11.1@71.029,46.075 71.031,46.073 v1(71.031,45.066)
  L4_SIG w0.13: v1(49.238,39.533) 49.285,39.486 52.507,39.486 52.842,39.821 52.888,39.867 52.888,40.003 52.481,40.41 52.481,40.546 53.069,41.134 57.666,41.134 57.762,41.038 57.762,40.846 57.666,40.75 53.228,40.75 53.024,40.546 53.024,40.41 53.16,40.275 53.296,40.275 53.387,40.366 58.438,40.366 58.599,40.366 69.114,40.366 v1(69.133,40.385)
  Bottom Layer w0.165: v1(71.031,45.066) 71.455,45.49 71.455,45.879 R3.1@71.664,46.088
SDIO1_D3: R4.1 R12.1 U1.B13 | length 41.3
  Top Layer w0.165: U1.B13@48.869,38.339 v1(49.284,38.756) ; v1(70.219,40.398) 72.829,43.008 72.829,45.243 ; v1(72.499,45.237) 72.506,45.243 72.829,45.243 ; R12.1@72.825,46.075 72.829,46.072 72.829,45.243
  L4_SIG w0.13: v1(49.284,38.756) 49.299,38.756 49.699,39.155 53.467,39.155 53.921,39.61 60.498,39.61 60.61,39.497 62.536,39.497 62.601,39.497 62.697,39.593 62.697,39.785 62.793,39.881 67.582,39.881 67.678,39.785 67.678,39.593 67.582,39.497 63.177,39.497 63.081,39.401 63.081,39.209 63.177,39.113 67.966,39.113 68.062,39.209 68.062,39.401 68.158,39.497 68.223,39.497 68.576,39.497 68.874,39.199 69.365,39.199 69.68,39.513 69.68,39.888 70.189,40.398 v1(70.219,40.398)
  Bottom Layer w0.165: v1(72.499,45.237) 72.499,45.243 72.985,45.73 72.985,45.744 73.33,46.088 R4.1@73.333,46.088
SDIO1_D4: R5.1 R13.1 U1.D5 | length 43.7
  Top Layer w0.165: U1.D5@42.469,36.739 42.477,36.739 42.869,37.132 v1(42.877,37.132) ; v1(69.066,38.144) 69.507,38.144 74.622,43.259 74.622,45.243 ; R13.1@74.622,46.075 74.622,45.243 ; v1(75.003,45.243) 74.622,45.243
  L4_SIG w0.13: v1(42.877,37.132) 42.877,37.147 43.278,37.548 45.936,37.548 45.944,37.556 46.267,37.556 46.275,37.548 52.101,37.548 52.646,38.092 55.202,38.092 55.462,37.832 56.458,37.832 56.523,37.832 56.619,37.928 56.619,38.504 56.715,38.6 58.301,38.6 58.397,38.504 58.397,38.312 58.301,38.216 57.099,38.216 57.003,38.12 57.003,37.928 57.099,37.832 59.761,37.832 60.189,37.832 60.927,38.57 62.125,38.57 62.55,38.144 v1(69.066,38.144)
  Bottom Layer w0.165: R5.1@74.495,46.088 74.498,46.088 74.976,45.611 74.976,45.296 75.003,45.269 v1(75.003,45.243)
SDIO1_D5: R6.1 R14.1 U1.D4 | length 40.4
  Top Layer w0.165: U1.D4@41.669,36.739 41.669,36.762 v1(42.057,37.15) ; R14.1@76.418,46.075 76.454,46.039 v1@76.454,45.099
  L4_SIG w0.13: v1(42.057,37.15) 43.256,38.349 53.732,38.349 54.241,38.858 70.227,38.858 v1(76.454,45.085)
  Bottom Layer w0.165: R6.1@76.037,46.088 76.283,45.842 76.283,45.282 76.454,45.111 v1(76.454,45.085)
SDIO1_D6: R7.1 R15.1 U1.F14 | length 41.5
  Top Layer w0.165: v1(49.259,35.524) 49.272,35.524 49.657,35.139 U1.F14@49.669,35.139 ; R15.1@78.214,46.075 78.232,46.057 v1(78.232,45.085)
  L4_SIG w0.13: v1(49.259,35.524) 49.703,35.968 50.73,35.968 50.907,35.791 63.675,35.791 63.74,35.791 63.836,35.887 63.836,36.079 63.932,36.175 68.779,36.175 70.351,37.747 70.486,37.747 70.622,37.611 70.622,37.475 69.058,35.911 69.058,35.775 69.194,35.64 69.33,35.64 71.165,37.475 71.165,37.611 71.029,37.747 71.029,37.882 71.075,37.928 v1(78.232,45.085)
  Bottom Layer w0.165: R7.1@77.579,46.088 77.583,46.088 78.214,45.457 78.214,45.103 v1(78.232,45.085) v1@78.25,45.103
SDIO1_D7: R8.1 R16.1 U1.F13 | length 39.3
  Top Layer w0.165: v1(48.482,35.583) 48.482,35.554 48.869,35.168 U1.F13@48.869,35.139 ; v1(79.248,44.323) 80.01,45.085 R16.1@80.01,46.075
  L4_SIG w0.13: v1(48.482,35.583) 48.482,35.556 48.919,35.12 50.515,35.12 50.713,35.317 70.242,35.317 v1(79.248,44.323)
  Bottom Layer w0.165: R8.1@79.121,46.088 79.248,45.961 v1(79.248,44.323)
SDRAM_A0: R45.1 U1.G4 | length 14.3
  Top Layer w0.165: v1(41.269,34.739) U1.G4@41.669,34.339
  Bottom Layer w0.165: R45.1@32.906,44.323 34.403,42.826 34.403,40.503 38.463,36.443 39.565,36.443 v1(41.269,34.739)
SDRAM_A1: R43.1 U1.G3 | length 12.8
  Top Layer w0.165: v1(40.469,34.732) 40.473,34.732 40.865,34.339 U1.G3@40.869,34.339
  Bottom Layer w0.165: R43.1@32.906,42.926 32.906,42.876 33.993,41.789 33.993,40.258 38.227,36.024 38.227,35.503 38.602,35.128 39.489,35.128 39.5,35.139 39.838,35.139 39.843,35.134 40.067,35.134 v1(40.469,34.732)
SDRAM_A2: R41.1 U1.G1 | length 10.1
  Top Layer w0.165: v1(38.876,34.703) 38.89,34.703 39.254,34.339 U1.G1@39.269,34.339
  Bottom Layer w0.165: R41.1@32.906,41.529 32.906,41.479 33.582,40.803 33.582,39.997 34.245,39.333 34.245,38.862 38.369,34.739 38.84,34.739 v1(38.876,34.703)
SDRAM_A3: R39.1 U1.H4 | length 11.9
  Top Layer w0.165: v1(41.276,33.952) 41.276,33.942 41.669,33.549 U1.H4@41.669,33.539
  Bottom Layer w0.165: R39.1@32.906,40.132 33.76,39.278 33.76,38.674 38.483,33.952 v1(41.276,33.952)
SDRAM_A4: R37.1 U1.J5 | length 12.1
  Top Layer w0.165: v1(42.069,33.139) U1.J5@42.469,32.739
  Bottom Layer w0.165: R37.1@32.906,38.735 32.906,38.678 38.04,33.544 41.664,33.544 v1(42.069,33.139)
SDRAM_A5: R35.1 U1.J4 | length 10.7
  Top Layer w0.165: v1(41.275,33.135) U1.J4@41.669,32.74
  Bottom Layer w0.165: R35.1@32.906,37.338 33.095,37.149 33.601,37.149 37.603,33.147 41.263,33.147 v1(41.275,33.135)
SDRAM_A6: R33.1 U1.R7 | length 12.5
  Top Layer w0.165: v1(43.667,28.342) U1.R7@44.069,27.939
  Bottom Layer w0.165: R33.1@32.906,30.353 35.206,30.353 37.655,27.904 42.419,27.904 42.878,28.363 43.647,28.363 v1(43.667,28.342)
SDRAM_A7: R31.1 U1.P7 | length 13.9
  Top Layer w0.165: v1(43.651,29.156) U1.P7@44.069,28.739
  Bottom Layer w0.165: R31.1@32.906,34.544 32.906,34.583 34.142,34.583 37.156,31.569 38.077,31.569 39.041,30.606 39.701,30.606 40.095,30.213 40.095,29.759 40.284,29.569 43.269,29.569 43.651,29.187 v1(43.651,29.156)
SDRAM_A8: R29.1 U1.P8 | length 15.5
  Top Layer w0.165: v1(44.456,29.177) 44.456,29.165 44.869,28.752 U1.P8@44.869,28.739
  Bottom Layer w0.165: R29.1@32.906,35.941 33.027,35.82 33.974,35.82 37.294,32.5 38.752,32.5 39.303,31.95 42.539,31.95 43.48,31.01 43.48,30.142 44.444,29.177 v1(44.456,29.177)
SDRAM_A9: R27.1 U1.R9 | length 13.5
  Top Layer w0.165: v1(44.47,27.539) 45.269,27.539 U1.R9@45.669,27.939
  Bottom Layer w0.165: R27.1@32.906,28.956 33.015,28.847 35.677,28.847 36.986,27.539 v1(44.47,27.539)
SDRAM_A10: R25.1 U1.T8 | length 12.7
  Top Layer w0.165: v1(44.469,26.739) U1.T8@44.869,27.139
  Bottom Layer w0.165: R25.1@32.906,26.162 37.621,26.162 38.025,25.758 43.488,25.758 v1(44.469,26.739)
SDRAM_A11: R23.1 U1.U8 | length 13
  Top Layer w0.165: v1(44.47,25.935) 44.47,25.937 44.869,26.337 U1.U8@44.869,26.339
  Bottom Layer w0.165: R23.1@32.906,24.765 33.212,25.071 38.025,25.071 38.454,24.643 43.191,24.643 44.47,25.921 v1(44.47,25.935)
SDRAM_B_D0: R78.1 U2.R8 | length 37.9
  Top Layer w0.14: U2.R8@51.157,62.401 51.457,62.401
  Top Layer w0.165: 51.457,62.401 60.552,62.401 60.938,62.015 v1(60.938,62.006)
  Bottom Layer w0.165: v1(60.938,62.006) 60.96,61.985 60.96,52.324 61.183,52.101 61.241,52.043 61.315,51.969 62.37,50.914 62.37,48.787 62.265,48.682 62.056,48.682 61.951,48.787 61.951,50.74 61.019,51.672 60.871,51.672 60.723,51.524 60.723,51.376 61.532,50.567 61.532,48.787 61.427,48.682 61.218,48.682 61.113,48.787 61.113,50.115 61.008,50.22 60.799,50.22 60.694,50.115 60.694,48.368 60.799,48.263 62.265,48.263 62.37,48.158 62.37,48.076 R78.1@62.37,47.117
SDRAM_B_D1: R77.1 U2.N7 | length 34.1
  Top Layer w0.14: U2.N7@49.557,61.601 49.969,61.189 51.457,61.189
  Top Layer w0.165: 51.457,61.189 52.141,61.189 52.358,61.406 56.499,61.406 56.582,61.406 56.687,61.511 56.687,62.007 56.791,62.111 57.001,62.111 57.106,62.007 57.106,61.226 57.21,61.121 57.42,61.121 57.525,61.226 57.525,62.007 57.629,62.111 57.839,62.111 57.944,62.007 57.944,61.226 58.048,61.121 58.258,61.121 58.363,61.226 58.363,62.007 58.467,62.111 58.677,62.111 58.782,62.007 58.782,61.226 58.886,61.121 59.096,61.121 59.201,61.226 59.201,61.887 59.305,61.991 59.515,61.991 59.62,61.887 59.62,61.511 59.724,61.406 60.06,61.406 60.408,61.406 v1(60.419,61.417)
  Bottom Layer w0.165: R77.1@58.039,50.051 58.089,50.051 58.575,50.537 58.634,50.596 58.634,50.744 58.288,51.089 58.288,51.237 58.436,51.385 58.585,51.385 59.046,50.924 59.194,50.924 59.342,51.072 59.342,51.22 58.881,51.682 58.881,51.83 59.029,51.978 59.177,51.978 59.559,51.596 59.707,51.596 59.855,51.744 59.855,51.893 59.473,52.274 59.473,52.422 59.621,52.57 59.77,52.57 60.308,52.032 60.456,52.032 60.605,52.18 60.605,52.328 60.38,52.553 60.38,53.134 60.38,61.378 v1(60.419,61.417)
SDRAM_B_D2: R76.1 U2.R9 | length 49.5
  Top Layer w0.14: U2.R9@51.157,63.201 51.179,63.224 51.457,63.224
  Top Layer w0.165: 51.457,63.224 52.319,63.224 52.775,63.224 52.858,63.224 52.962,63.328 52.962,63.576 53.067,63.681 53.277,63.681 53.381,63.576 53.381,63.196 53.486,63.091 53.696,63.091 53.8,63.196 53.8,63.275 53.905,63.38 54.115,63.38 54.219,63.275 54.219,63.196 54.324,63.091 54.534,63.091 54.638,63.196 54.638,64.065 54.743,64.17 54.953,64.17 55.057,64.065 55.057,63.328 55.162,63.224 55.263,63.224 55.752,63.224 v1(55.754,63.226)
  Bottom Layer w0.165: R76.1@49.657,50.051 49.707,50.051 50.538,50.882 50.596,50.94 50.744,50.94 50.892,50.792 51.04,50.792 51.188,50.94 51.188,51.088 50.744,51.532 50.744,51.681 55.335,56.271 55.335,57.171 55.44,57.276 55.649,57.276 55.754,57.171 55.754,56.098 51.337,51.681 51.337,51.532 51.485,51.384 51.633,51.384 56.173,55.924 56.173,56.333 56.278,56.438 56.487,56.438 56.592,56.542 56.592,57.59 56.487,57.695 55.859,57.695 55.754,57.799 55.754,61.65 55.859,61.755 56.068,61.755 56.173,61.65 56.173,58.218 56.278,58.114 56.487,58.114 56.592,58.218 56.592,62.069 56.487,62.174 55.859,62.174 55.754,62.279 55.754,62.361 v1(55.754,63.226)
SDRAM_B_D3: R75.1 U2.N8 | length 42.1
  Top Layer w0.14: U2.N8@49.557,62.401 49.958,62.803 49.958,63.034 49.957,63.036 49.957,63.367 49.958,63.369 49.958,63.5
  Top Layer w0.165: 49.958,63.5 49.958,63.863 50.697,64.602 51.549,64.602 51.632,64.602 51.736,64.707 51.736,64.756 51.841,64.861 52.051,64.861 52.155,64.756 52.155,63.619 52.26,63.514 52.47,63.514 52.574,63.619 52.574,64.756 52.679,64.861 52.889,64.861 52.993,64.756 52.993,64.6 53.098,64.496 53.308,64.496 53.412,64.6 53.412,64.756 53.517,64.861 53.727,64.861 53.831,64.756 53.831,63.775 53.936,63.67 54.146,63.67 54.25,63.775 54.25,64.498 54.355,64.602 55.666,64.602 v1(55.859,64.602)
  Bottom Layer w0.165: R75.1@51.054,50.051 52.44,51.437 52.499,51.496 52.647,51.496 52.795,51.347 52.943,51.347 53.091,51.496 53.091,51.644 52.943,51.792 52.943,51.94 53.091,52.088 53.239,52.088 53.684,51.644 53.832,51.644 57.46,55.272 57.46,55.42 57.312,55.568 57.164,55.568 53.832,52.236 53.684,52.236 53.536,52.384 53.536,52.533 56.867,55.864 57,55.997 57.042,56.039 57.042,62.481 56.356,63.167 56.356,64.105 v1(55.859,64.602)
SDRAM_B_D4: R74.1 U2.P9 | length 47.9
  Top Layer w0.14: U2.P9@50.366,63.201 50.766,62.801 50.991,62.801 51.322,62.801 51.457,62.801
  Top Layer w0.165: 51.457,62.801 60.822,62.801 v1(62.23,61.393)
  Bottom Layer w0.165: v1(62.23,61.393) 67.47,56.153 67.47,35.453 R74.1@62.37,30.353
SDRAM_B_D5: R73.1 U2.M8 | length 46.9
  Top Layer w0.14: U2.M8@48.757,62.401 49.156,62.002 49.156,61.768 49.157,61.436 ; 49.156,61.435 49.156,61.188 49.513,60.831 51.457,60.831
  Top Layer w0.165: 51.457,60.831 52.319,60.831 60.876,60.831 v1(62.23,59.478)
  Bottom Layer w0.165: v1(62.23,59.478) 67.133,54.575 67.133,36.513 R73.1@62.37,31.75
SDRAM_B_D6: R72.1 U2.M7 | length 41
  Top Layer w0.14: 48.373,63.5 48.373,63.383 48.357,63.367 48.357,62.236 48.358,62.234 48.358,62 U2.M7@48.757,61.601
  Top Layer w0.165: 48.373,63.5 48.373,64.143 48.351,64.165 48.351,64.553 48.95,65.151 56.264,65.151 v1(57.502,63.913)
  Bottom Layer w0.165: R72.1@52.451,50.051 53.461,51.061 54.035,51.061 57.912,54.938 57.912,56.654 57.912,56.737 57.807,56.842 57.598,56.842 57.493,56.946 57.493,62.237 57.598,62.342 57.807,62.342 57.912,62.237 57.912,57.365 58.017,57.261 58.226,57.261 58.331,57.365 58.331,62.656 58.226,62.761 58.017,62.761 57.912,62.866 57.912,62.948 57.912,63.543 57.541,63.913 v1(57.502,63.913)
SDRAM_B_D7: R70.1 U2.L8 | length 42.1
  Top Layer w0.14: 47.557,63.367 47.557,63.036 47.557,62.801 U2.L8@47.957,62.401 ; 47.558,63.368 47.558,63.5
  Top Layer w0.165: 47.558,63.5 47.558,64.797 48.547,65.786 49.168,65.786 49.25,65.786 49.355,65.891 49.355,66.026 49.46,66.131 49.669,66.131 49.774,66.026 49.774,65.546 49.879,65.441 50.088,65.441 50.193,65.546 50.193,66.026 50.298,66.131 50.507,66.131 50.612,66.026 50.612,65.546 50.717,65.441 50.926,65.441 51.031,65.546 51.031,65.932 51.136,66.037 51.345,66.037 51.45,65.932 51.45,65.891 51.555,65.786 51.8,65.786 v1(55.859,65.786)
  Bottom Layer w0.165: R70.1@53.86,50.051 54.601,50.792 54.733,50.924 54.807,50.998 57.918,54.109 58.066,54.109 58.214,53.961 58.214,53.813 56.002,51.6 56.002,51.452 56.15,51.304 56.298,51.304 58.807,53.813 58.807,53.961 58.363,54.405 58.363,54.554 58.68,54.871 58.68,55.088 58.68,55.491 58.575,55.595 58.307,55.595 58.202,55.7 58.202,55.91 58.307,56.014 58.854,56.014 58.958,56.119 58.958,56.329 58.854,56.433 58.785,56.433 58.68,56.538 58.68,56.621 58.68,63.4 57.042,65.038 56.614,65.038 v1@55.865,65.786
SDRAM_B_D8: R68.1 U2.L2 | length 39.8
  Top Layer w0.14: U2.L2@47.957,57.601 48.356,57.202 48.356,56.968 ; 48.356,56.501 48.356,56.635 48.357,56.967
  Top Layer w0.165: 48.356,56.501 48.356,55.576 48.674,55.257 48.732,55.199 48.881,55.199 49.029,55.347 49.177,55.347 52.193,52.331 52.193,52.183 52.045,52.035 51.897,52.035 49.177,54.755 49.029,54.755 48.881,54.607 48.881,54.458 51.897,51.442 52.045,51.442 52.193,51.59 52.341,51.59 52.4,51.532 53.71,50.221 62.329,50.221 64.701,47.849 v1(64.733,47.849)
  Bottom Layer w0.165: R68.1@62.37,40.132 62.37,40.182 64.735,42.548 64.735,47.847 v1(64.733,47.849)